# Altium PCB NNLightSwitcher.PcbDoc (part 1 of 3)
Units mil, origin at the board's own origin, x right, y up, seen from the top; angles counter-clockwise.
Board outline 1590 x 2535 mil, 2 copper layers (Top Layer, Bottom Layer); 347 components, 370 nets, 1639 pads, 0 vias.
Unrouted connection lines stored in the file: 1035.
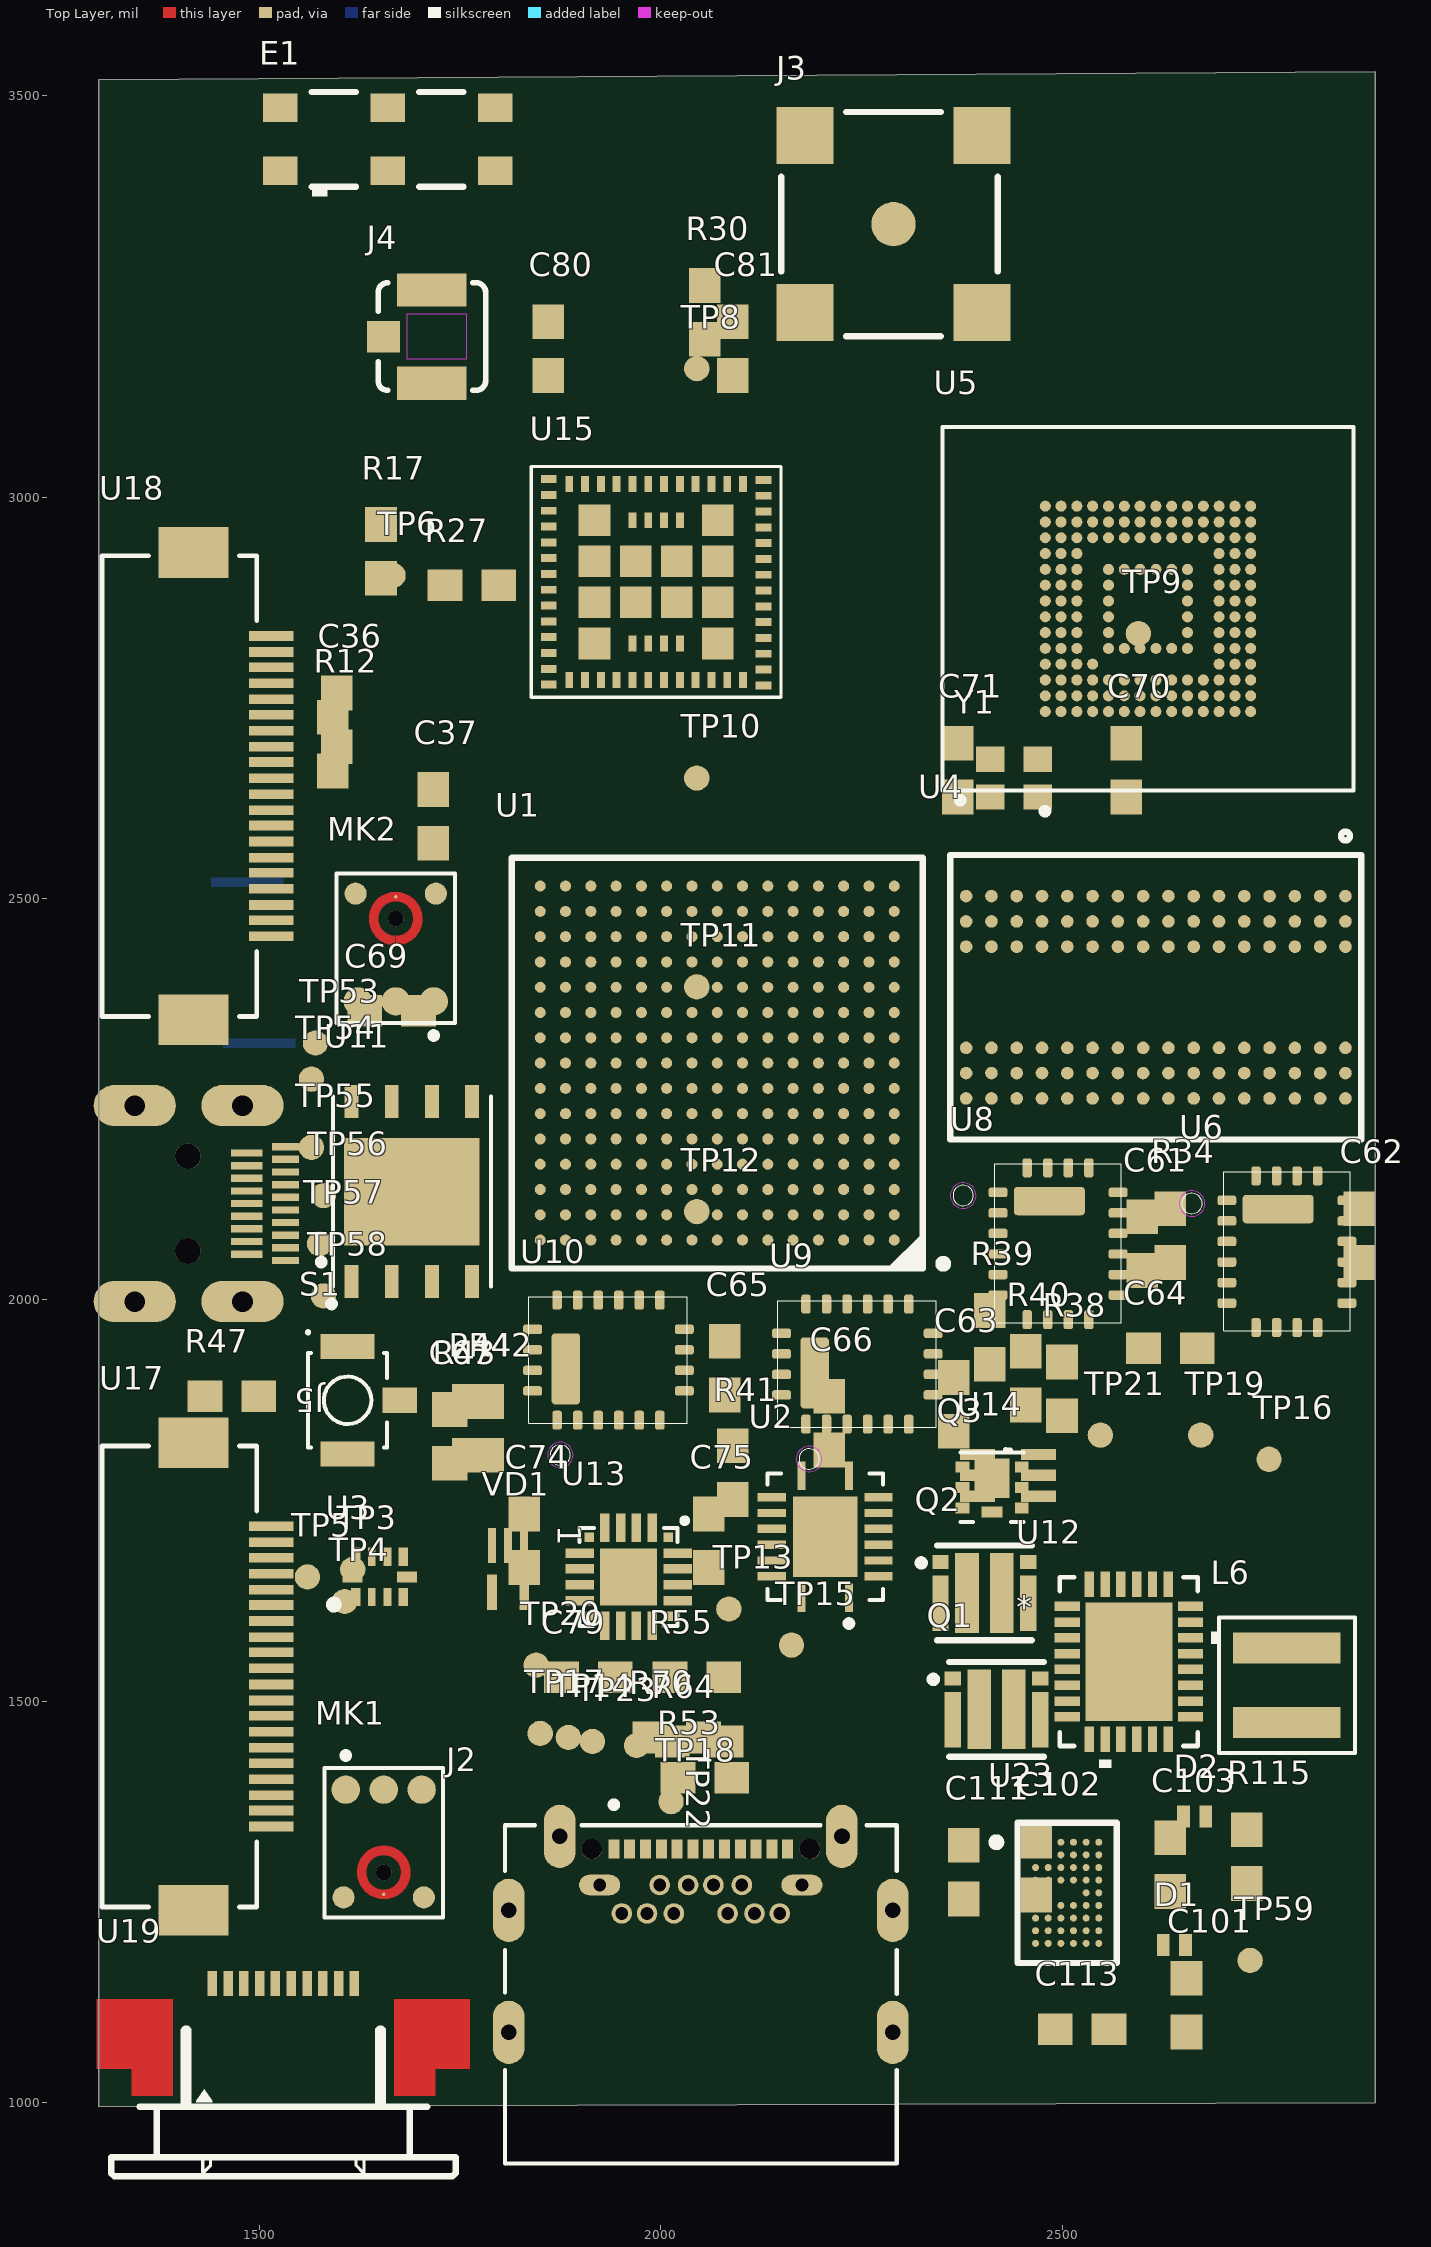
[diagram p0: Top Layer view]
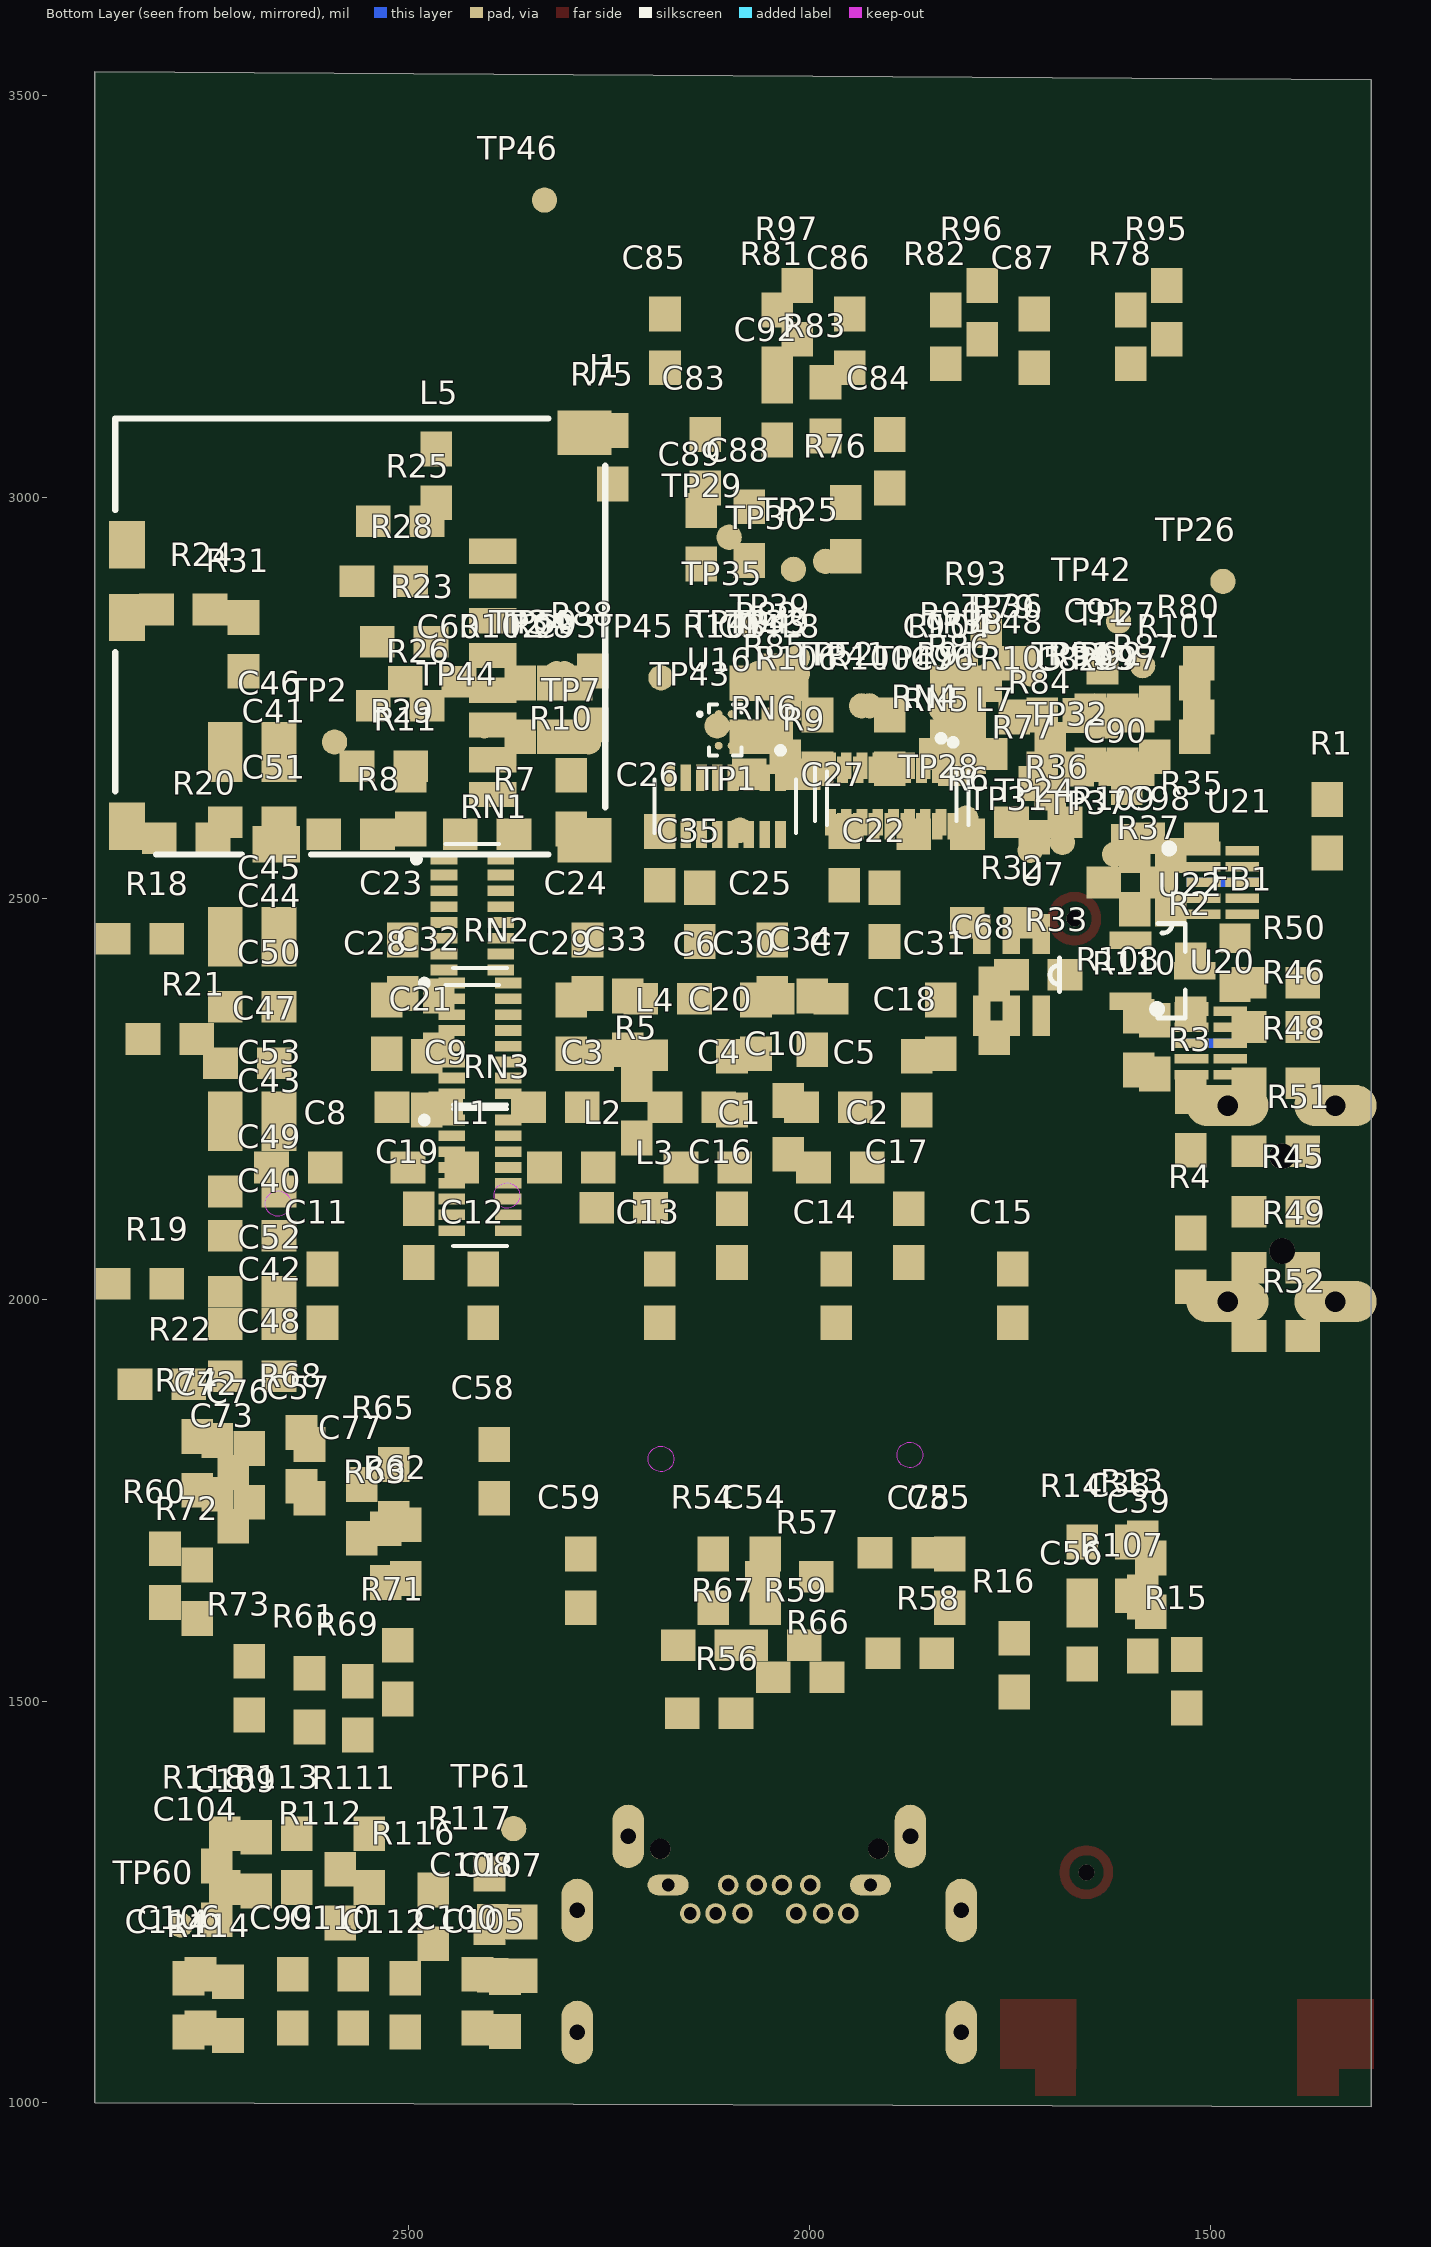
[diagram p1: Bottom Layer view, seen from below]

## Layer stack, top to bottom
Top Solder: solder mask 0.4, Solder Resist, Dk 3.5
Top Layer: signal copper 1.4
Dielectric 1: dielectric 12.6, FR-4, Dk 4.8
Bottom Layer: signal copper 1.4
Bottom Solder: solder mask 0.4, Solder Resist, Dk 3.5

## Board outline
1300,995 1300,3520 2890,3530 2890,1000

## Design rules (kind name [scope] priority, off if disabled: settings)
Clearance [All] p1: gap=10 ignorepadtopadclearanceinfootprint=FALSE except(0: Arc-Hole Track-Hole SMDPad-Hole THPad-Hole Via-Hole Fill-Hole Poly-Hole Region-Hole Text-Hole)
DiffPairsRouting [All] p1: maxlimit=10 minlimit=10 mostfreqgap=10 toplayer_minwidth=15 toplayer_maxwidth=15 toplayer_prefwidth=15 bottomlayer_minwidth=15 bottomlayer_maxwidth=15 bottomlayer_prefwidth=15 maxuncoupledlength=500
PolygonConnect [All] p1: connectstyle=Relief reliefconductorwidth=10 reliefentries=4 polygonreliefangle="90 Angle" airgapwidth=10
RoutingVias [All] p1: holewidth=28 width=50 viastyle="Through Hole" minholewidth=28 minwidth=50 maxholewidth=28 maxwidth=50
SolderMaskExpansion [All] p1: expansion=4
Width [All] p1: maxlimit=10 minlimit=10 preferedwidth=10
29 further rules are at their usual default settings.

## Classes and differential pairs
component class Zynq: C1 C2 C3 C4 C5 C6 C7 C8 C9 C10 C11 C12 C13 C14 C15 C16 C17 C18 C19 C20 C21 C22 C23 C24 C25 C26 C27 C28 C29 C30 C31 C32 C33 C34 C35 L1 L2 L3 L4 R1 R2 R3 R4 R5 R6 R7 R8 R9 R10 R11 TP1 TP2 U1 U2 Y1
component class "Wireless charger": C99 C100 C101 C102 C103 C104 C105 C106 C107 C108 C109 C110 C111 C112 C113 C114 D1 D2 R111 R112 R113 R114 R115 R116 R117 R118 TP59 TP60 TP61 U23
component class WiFI: C82 C83 C84 C85 C86 C87 C88 C89 C90 C91 C92 C93 C94 C95 C96 C97 E1 J3 J4 L7 L8 R75 R76 R77 R78 R79 R80 R81 R82 R83 R84 R85 R86 R87 R88 R89 R90 R91 R92 R93 R94 R95 R96 R97 R98 R99 R100 R101 R102 R103 R104 R105 R106 TP24 TP25 TP26 TP27 TP28 TP29 TP30 TP31 TP32 TP33 TP34 TP35 TP36 TP37 TP38 TP39 TP40 TP41 TP42 TP43 TP44 TP45 TP46 TP47 TP48 TP49 TP50 TP51 TP52 U15 U16
component class USB: C70 C71 C72 C73 C74 C75 C76 C77 C78 C79 C80 C81 J2 L6 Q1 Q2 Q3 R53 R54 R55 R56 R57 R58 R59 R60 R61 R62 R63 R64 R65 R66 R67 R68 R69 R70 R71 R72 R73 R74 TP14 TP15 TP16 TP17 TP18 TP19 TP20 TP21 TP22 TP23 U12 U13 U14 VD1
component class "QSPI flash": C69 R45 R46 R47 R48 R49 R50 R51 R52 U11
component class Power: B1 C61 C62 C63 C64 C65 C66 C67 C68 R32 R33 R34 R35 R36 R37 R38 R39 R40 R41 R42 R43 R44 S1 TP7 TP8 TP9 TP10 TP11 TP12 TP13 U6 U7 U8 U9 U10
component class eMMC: C54 C55 C56 C57 C58 C59 C60 J1 L5 R23 R24 R25 R26 R27 R28 R29 R30 R31 RN4 RN5 RN6 U5
component class DDR3: C40 C41 C42 C43 C44 C45 C46 C47 C48 C49 C50 C51 C52 C53 R18 R19 R20 R21 R22 RN1 RN2 RN3 U4
component class Connectors: C98 FB1 J5 R107 R108 R109 R110 TP53 TP54 TP55 TP56 TP57 TP58 U17 U18 U19 U20 U21 U22
component class Audio: C36 C37 C38 C39 MK1 MK2 R12 R13 R14 R15 R16 R17 TP3 TP4 TP5 TP6 U3
differential pair USB_D: +USB_D_P -USB_D_N
differential pair HDMI_TXC: +HDMI_TXC_P -HDMI_TXC_N
differential pair HDMI_TX2: +HDMI_TX2_P -HDMI_TX2_N
differential pair HDMI_TX1: +HDMI_TX1_P -HDMI_TX1_N
differential pair HDMI_TX0: +HDMI_TX0_P -HDMI_TX0_N
differential pair *USB_D: +*USB_D_P -*USB_D_N

## Components (designator, comment, footprint, x,y, rotation, side; value= is the part's Value field where it differs from the comment)
C1 "CC0201JRNPO8BN101" *0603 2126.54,2165 r180 bottom value=100pF
C2 "CC0201JRNPO8BN101" *0603 1961.54,2165 r180 bottom value=100pF
C3 "CC0201JRNPO8BN101" *0603 2316.54,2240 r180 bottom value=100pF
C4 "CC0201JRNPO8BN101" *0603 2146.54,2240 r180 bottom value=100pF
C5 "CC0201JRNPO8BN101" *0603 1976.54,2240 r180 bottom value=100pF
C6 "CC0201JRNPO8BN101" *0603 2176.54,2375 r180 bottom value=100pF
C7 "CC0201JRNPO8BN101" *0603 2006.54,2375 r180 bottom value=100pF
C8 "CC0201JRNPO8BN101" *0603 2636.54,2165 r180 bottom value=100pF
C9 "CC0201JRNPO8BN101" *0603 2486.54,2240 r180 bottom value=100pF
C10 "CC0201JRNPO8BN101" *0603 2026.54,2215 r90 bottom value=100pF
C11 "CC0201JRNPO8BN101" *0603 2606.54,2005 r90 bottom value=100pF
C12 "CC0201JRNPO8BN101" *0603 2406.54,2005 r90 bottom value=100pF
C13 "CC0201JRNPO8BN101" *0603 2186.54,2005 r90 bottom value=100pF
C14 "CC0201JRNPO8BN101" *0603 1966.54,2005 r90 bottom value=100pF
C15 "CC0201JRNPO8BN101" *0603 1746.54,2005 r90 bottom value=100pF
C16 "CC0201JRNPO8BN101" *0603 2096.54,2080 r90 bottom value=100pF
C17 "CC0201JRNPO8BN101" *0603 1876.54,2080 r90 bottom value=100pF
C18 "CC0201JRNPO8BN101" *0603 1866.54,2270 r90 bottom value=100pF
C19 "CC0201JRNPO8BN101" *0603 2486.54,2080 r90 bottom value=100pF
C20 "CC0201JRNPO8BN101" *0603 2096.54,2270 r90 bottom value=100pF
C21 "CC0201JRNPO8BN101" *0603 2476.54,2270 r90 bottom value=100pF
C22 "CC0201JRNPO8BN101" *0603 1906.54,2480 r90 bottom value=100pF
C23 "CC0201JRNPO8BN101" *0603 2506.54,2415 r90 bottom value=100pF
C24 "CC0201JRNPO8BN101" *0603 2276.54,2415 r90 bottom value=100pF
C25 "CC0201JRNPO8BN101" *0603 2046.54,2415 r90 bottom value=100pF
C26 "CC0201JRNPO8BN101" *0603 2186.54,2550 r90 bottom value=100pF
C27 "CC0201JRNPO8BN101" *0603 1956.54,2550 r90 bottom value=100pF
C28 "CC0201JRNPO8BN101" *0603 2526.54,2340 r90 bottom value=100pF
C29 "CC0201JRNPO8BN101" *0603 2296.54,2340 r90 bottom value=100pF
C30 "CC0201JRNPO8BN101" *0603 2066.54,2340 r90 bottom value=100pF
C31 "CC0201JRNPO8BN101" *0603 1836.54,2340 r90 bottom value=100pF
C32 "CC0201JRNPO8BN101" *0603 2461.54,2345 r90 bottom value=100pF
C33 "CC0201JRNPO8BN101" *0603 2226.54,2345 r90 bottom value=100pF
C34 "CC0201JRNPO8BN101" *0603 1996.54,2345 r90 bottom value=100pF
C35 "CC0201JRNPO8BN101" *0603 2136.54,2480 r90 bottom value=100pF
C36 "0402B103K500CT" *0603 1596.71,2722.43 r90 top value=0.01uF
C37 "CC0201JRNPO8BN101" *0603 1716.71,2602.43 r90 top value=100pF
C38 "0402B103K500CT" *0603 1600,1665 r90 bottom value=0.01uF
C39 "CC0201JRNPO8BN101" *0603 1575,1645 r90 bottom value=100pF
C40 "CC0201JRNPO8BN101" *0603 2694.12,2080 r0 bottom value=100pF
C41 "CC0201JRNPO8BN101" *0603 2694.12,2665 r0 bottom value=100pF
C42 "CC0201JRNPO8BN101" *0603 2694.12,1970 r0 bottom value=100pF
C43 "CC0201JRNPO8BN101" *0603 2694.12,2205 r0 bottom value=100pF
C44 "CC0201JRNPO8BN101" *0603 2694.12,2435 r0 bottom value=100pF
C45 "CC0201JRNPO8BN101" *0603 2694.12,2470 r0 bottom value=100pF
C46 "CC0201JRNPO8BN101" *0603 2694.12,2700 r0 bottom value=100pF
C47 "CC0201JRNPO8BN101" *0603 2700,2295 r0 bottom value=100pF
C48 "CC0201JRNPO8BN101" *0603 2694.12,1905 r0 bottom value=100pF
C49 "CC0201JRNPO8BN101" *0603 2694.12,2135 r0 bottom value=100pF
C50 "CC0201JRNPO8BN101" *0603 2694.12,2365 r0 bottom value=100pF
C51 "CC0201JRNPO8BN101" *0603 2694.12,2595 r0 bottom value=100pF
C52 "CC0201JRNPO8BN101" *0603 2694.12,2010 r0 bottom value=100pF
C53 "CC0201JRNPO8BN101" *0603 2694.12,2240 r0 bottom value=100pF
C54 "CC0201JRNPO8BN101" *0603 2055,1650 r90 bottom value=100pF
C55 "CC0201JRNPO8BN101" *0603 1825,1650 r90 bottom value=100pF
C56 "CC0201JRNPO8BN101" *0603 1660,1580 r90 bottom value=100pF
C57 "CC0201JRNPO8BN101" *0603 2622.76,1786.5 r90 bottom value=100pF
C58 "CC0201JRNPO8BN101" *0603 2392.76,1786.5 r90 bottom value=100pF
C59 "CC0201JRNPO8BN101" *0603 2285,1650 r90 bottom value=100pF
C60 "CC0201JRNPO8BN101" *0603 2470,2770 r0 bottom value=100pF
C61 "CC0201JRNPO8BN101" *0603 2600,2070 r90 top value=100pF
C62 "CC0201JRNPO8BN101" *0603 2870,2080 r90 top value=100pF
C63 "CC0201JRNPO8BN101" *0603 2365,1870 r90 top value=100pF
C64 "CC0201JRNPO8BN101" *0603 2635,1940 r180 top value=100pF
C65 "CC0201JRNPO8BN101" *0603 2080,1915 r90 top value=100pF
C66 "CC0201JRNPO8BN101" *0603 2210,1846.54 r90 top value=100pF
C67 "CC0201JRNPO8BN101" *0603 1735,1830 r90 top value=100pF
C68 "CC0201JRNPO8BN101" *0603 1770,2360 r90 bottom value=100pF
C69 "CC0201JRNPO8BN101" *0603 1665,2360 r180 top value=100pF
C70 "GJM1555C1HR50BB01J" *0603 2580,2660 r90 top value=0.5pF
C71 "GJM1555C1HR50BB01J" *0603 2370,2660 r90 top value=0.5pF
C72 "GJM1555C1HR50BB01J" *0603 2737.76,1791.5 r90 bottom value=0.5pF
C73 "GJM1555C1HR50BB01J" *0603 2717.76,1751.5 r90 bottom value=0.5pF
C74 "GJM1555C1HR50BB01J" *0603 1830,1700 r90 top value=0.5pF
C75 "GJM1555C1HR50BB01J" *0603 2060,1700 r90 top value=0.5pF
C76 "GJM1555C1HR50BB01J" *0603 2697.76,1781.5 r90 bottom value=0.5pF
C77 "GJM1555C1HR50BB01J" *0603 2557.76,1736.5 r90 bottom value=0.5pF
C78 "GJM1555C1HR50BB01J" *0603 1885,1685 r180 bottom value=0.5pF
C79 "GJM1555C1HR50BB01J" *0603 1910,1530 r0 top value=0.5pF
C80 "GJM1555C1HR50BB01J" *0603 1860,3185 r90 top value=0.5pF
C81 "GJM1555C1HR50BB01J" *0603 2090,3185 r90 top value=0.5pF
C82 "0402N8R2C500CT" *0603 1665,2694.67 r90 bottom value=8.2pF
C83 "GJM1555C1HR50BB01J" *0603 2130,3044.67 r90 bottom value=0.5pF
C84 "GJM1555C1HR50BB01J" *0603 1900,3044.67 r90 bottom value=0.5pF
C85 "GJM1555C1HR50BB01J" *0603 2180,3194.67 r90 bottom value=0.5pF
C86 "GJM1555C1HR50BB01J" *0603 1950,3194.67 r90 bottom value=0.5pF
C87 "GJM1555C1HR50BB01J" *0603 1720,3194.67 r90 bottom value=0.5pF
C88 "GJM1555C1HR50BB01J" *0603 2075,2954.67 r90 bottom value=0.5pF
C89 "GJM1555C1HR50BB01J" *0603 2135,2950 r90 bottom value=0.5pF
C90 "GJM1555C1HR50BB01J" *0603 1605,2604.67 r90 bottom value=0.5pF
C91 "GJM1555C1H2R2BB01D" *0603 1635,2754.67 r90 bottom value=2.2pF
C92 "CMP-0006426-2" *0603 2040,3104.67 r90 bottom value=1pF
C93 "CC0201JRNPO8BN101" *0603 2290,2735 r90 bottom value=100pF
C94 "CC0201JRNPO8BN101" *0603 2060,2735 r90 bottom value=100pF
C95 "CC0201JRNPO8BN101" *0603 1830,2735 r90 bottom value=100pF
C96 "CC0201JRNPO8BN101" *0603 1820,2695 r90 bottom value=100pF
C97 "CC0201JRNPO8BN101" *0603 1590,2695 r90 bottom value=100pF
C98 "CC0201JRNPO8BN101" *0603 1550,2520 r90 bottom value=100pF
C99 "CC0201JRNPO8BN101" *0603 2643.5,1126.5 r90 bottom value=100pF
C100 "CC0201JRNPO8BN101" *0603 2413.5,1126.5 r90 bottom value=100pF
C101 "CC0201JRNPO8BN101" *0603 2655,1121.5 r90 top value=100pF
C102 "CC0201JRNPO8BN101" *0603 2467.76,1292.24 r90 top value=100pF
C103 "CC0201JRNPO8BN101" *0603 2635,1296.5 r90 top value=100pF
C104 "CC0201JRNPO8BN101" *0603 2738.5,1261.5 r90 bottom value=100pF
C105 "CC0201JRNPO8BN101" *0603 2379.25,1122.24 r90 bottom value=100pF
C106 "CC0201JRNPO8BN101" *0603 2758.5,1126.5 r90 bottom value=100pF
C107 "CC0201JRNPO8BN101" *0603 2358.5,1191.5 r90 bottom value=100pF
C108 "CC0201JRNPO8BN101" *0603 2394.25,1192.24 r90 bottom value=100pF
C109 "CC0201JRNPO8BN101" *0603 2689.25,1297.24 r90 bottom value=100pF
C110 "CC0201JRNPO8BN101" *0603 2568.5,1126.5 r90 bottom value=100pF
C111 "CC0201JRNPO8BN101" *0603 2377.76,1287.24 r90 top value=100pF
C112 "CC0201JRNPO8BN101" *0603 2503.5,1121.5 r90 bottom value=100pF
C113 "CC0201JRNPO8BN101" *0603 2525,1091.5 r180 top value=100pF
C114 "CC0201JRNPO8BN101" *0603 2773.5,1121.5 r90 bottom value=100pF
D1 "PESD12VV1BL" *SOD882(T) 2640,1196.5 r0 top
D2 "PESD12VV1BL" *SOD882(T) 2665,1356.5 r0 top
E1 "CMP-0001857-1" Ethertronics_M830520 1660,3445.63 r90 top
FB1 "MPZ1608S221ATA00" *INDC1608X80 1470,2420 r270 bottom
J1 "5025700893" MOLEX_5025700893 2559.65,2826.38 r270 bottom
J2 "2129691-1" *TE_2129691-1_2129691-1(Primary) 2050,1135 r0 top
J3 "CMP-0055832-1" Hustsan_SMA-10V21-TGG 2290,3340 r0 top
J4 "U.FL-R-SMT-1(01)" CONN_UFL-R-SMT-1 1715,3200 r0 top
J5 "685119248123" *WURTH_685119248123_685119248123(Primary) 1400,2120 r270 top
L1 "BKP0603HS121-T" *0603 2466.54,2165 r180 bottom value=3.9nH
L2 "BKP0603HS121-T" *0603 2296.54,2165 r180 bottom value=3.9nH
L3 "BKP0603HS121-T" *0603 2231.54,2115 r180 bottom value=3.9nH
L4 "BKP0603HS121-T" *0603 2231.54,2305 r180 bottom value=3.9nH
L5 "BKP0603HS121-T" *0603 2465,3026.54 r90 bottom value=3.9nH
L6 "XFL4020-102MEC" *INDM4040X210 2780,1520 r270 top
L7 "CMP-0058633-2" *0603 1808.46,2680 r180 bottom value=3.9nH
L8 "LQM18PN2R2MFRL" *INDC1608X95N 2050,2765 r180 bottom
MK1 "ICS-40300" *MIC_ICS-40300 1655,1286.85 r0 top
MK2 "ICS-40300" *MIC_ICS-40300 1670,2475 r180 top
Q1 "FDMC8030" *TRANS_FDMC8030 2418.35,1490 r0 top
Q2 "FDMC8030" *TRANS_FDMC8030 2403.35,1635 r0 top
Q3 "NTLUS3A18PZTAG" *TRANS_NTLUS3A18PZTAG 2412.76,1766.5 r0 top
R1 "" *0603 1355,2590 r90 bottom value="2.61 K"
R2 "" *0603 1525,2390 r90 bottom value="12.1 K"
R3 "" *0603 1525,2220 r90 bottom value="12.1 K"
R4 "" *0603 1525,2050 r90 bottom value="80.6 R"
R5 "" *0603 2215,2235 r90 bottom value="80.6 R"
R6 "" *0603 1836.54,2580 r180 bottom value="4.7 K"
R7 "" *0603 2401.54,2580 r180 bottom value="4.7 K"
R8 "" *0603 2571.54,2580 r180 bottom value="33 R"
R9 "" *0603 2041.54,2655 r180 bottom value="1.43 K"
R10 "" *0603 2296.54,2620 r90 bottom value="1.43 K"
R11 "" *0603 2496.54,2620 r90 bottom value="1.43 K"
R12 "" *0603 1591.71,2692.43 r90 top value=?
R13 "" *0603 1585,1670 r90 bottom value=?
R14 "" *0603 1660,1665 r90 bottom value="47 K"
R15 "" *0603 1530,1525 r90 bottom value=?
R16 "" *0603 1745,1545 r90 bottom value=?
R17 "" *0603 1651.71,2932.43 r90 top value="47 K"
R18 "" *0603 2834.12,2450 r0 bottom value="4.7 K"
R19 "" *0603 2834.12,2020 r0 bottom value="4.7 K"
R20 "" *0603 2776.54,2575 r0 bottom value="80.6 R"
R21 "" *0603 2796.54,2325 r0 bottom value="240 R"
R22 "" *0603 2806.54,1895 r0 bottom value="0 R"
R23 "Resistor" *0603 2505,2820 r0 bottom value="12K1 1%"
R24 "Resistor" *0603 2780,2860 r0 bottom value="12K1 1%"
R25 "Resistor" *0603 2510,2970 r0 bottom value="12K1 1%"
R26 "Resistor" *0603 2510,2740 r0 bottom value="12K1 1%"
R27 "Resistor" *0603 1765,2890 r180 top value="33 R 1%"
R28 "Resistor" *0603 2530,2895 r0 bottom value="12K1 1%"
R29 "Resistor" *0603 2530,2665 r0 bottom value="12K1 1%"
R30 "Resistor" *0603 2055,3230 r90 top value="0 R"
R31 "Resistor" *0603 2705,2816.54 r90 bottom value="0 R"
R32 "Resistor" *0603 1770,2470 r180 bottom value="1K43 1%"
R33 "Resistor" *0603 1715,2405 r180 bottom value="12K1 1%"
R34 "Resistor" *0603 2635,2080 r90 top value="0 R"
R35 "Resistor" *0603 1545,2575 r180 bottom value="1K43 1%"
R36 "Resistor" *0603 1715,2595 r180 bottom value="100 R 1%"
R37 "Resistor" *0603 1600,2520 r180 bottom value="2K61 1%"
R38 "Resistor" *0603 2500,1889.12 r90 top value="200 K 1%"
R39 "Resistor" *0603 2410,1953.46 r90 top value="160 K 1%"
R40 "Resistor" *0603 2455,1902.58 r90 top value="0 R"
R41 "Resistor" *0603 2090,1785 r90 top value="0 R"
R42 "Resistor" *0603 1785,1840 r90 top value="200 K 1%"
R43 "Resistor" *0603 1740,1830 r90 top value="301 K 1%"
R44 "Resistor" *0603 1760,1840 r90 top value="0 R"
R45 "Resistor" *0603 1419.12,2110 r0 bottom value="33 R 1%"
R46 "Resistor" *0603 1419.12,2340 r0 bottom value="12K1 1%"
R47 "Resistor" *0603 1465.88,1880 r180 top value="1K43 1%"
R48 "Resistor" *0603 1419.12,2270 r0 bottom value="12K1 1%"
R49 "Resistor" *0603 1419.12,2040 r0 bottom value="12K1 1%"
R50 "Resistor" *0603 1419.12,2395 r0 bottom value="12K1 1%"
R51 "Resistor" *0603 1419.12,2185 r0 bottom value="12K1 1%"
R52 "Resistor" *0603 1419.12,1955 r0 bottom value="0 R"
R53 "" *0603 2055,1405 r0 top value="33 R"
R54 "" *0603 2120,1650 r90 bottom value="33 R"
R55 "" *0603 2045,1530 r0 top value="33 R"
R56 "" *0603 2125,1485 r180 bottom value="33 R"
R57 "" *0603 2025,1655 r180 bottom value=?
R58 "" *0603 1875,1560 r180 bottom value=?
R59 "" *0603 2040,1570 r180 bottom value="1 M"
R60 "Resistor" *0603 2802.76,1656.5 r90 bottom value="0 R"
R61 "Resistor" *0603 2622.76,1501.5 r90 bottom value="3.6 K"
R62 "Resistor" *0603 2502.76,1686.5 r90 bottom value="0 R"
R63 "Resistor" *0603 2527.76,1681.5 r90 bottom value="3.6 K"
R64 "Resistor" *0603 2048,1450 r0 top value="0 R"
R65 "Resistor" *0603 2517.76,1761.5 r90 bottom value="0 R"
R66 "" *0603 2011.54,1530 r180 bottom value="33 R"
R67 "" *0603 2130,1570 r180 bottom value="33 R"
R68 "Resistor" *0603 2632.76,1801.5 r90 bottom value="Thermistor 11.5 K"
R69 "Resistor" *0603 2562.76,1491.5 r90 bottom value="1 K"
R70 "" *0603 2020,1455 r0 top value="100 K"
R71 "Resistor" *0603 2512.76,1536.5 r90 bottom value="47 K"
R72 "Resistor" *0603 2762.76,1636.5 r90 bottom value="1 K"
R73 "Resistor" *0603 2697.76,1516.5 r90 bottom value="1 K"
R74 "Resistor" *0603 2762.76,1796.5 r90 bottom value="1.21 K"
R75 "" *0603 2245,3049.67 r90 bottom value="0 R"
R76 "" *0603 1955,2959.67 r90 bottom value="0 R"
R77 "" *0603 1720,2609.67 r90 bottom value="0 R"
R78 "" *0603 1600,3199.67 r90 bottom value="0 R"
R79 "" *0603 1745,2759.67 r90 bottom value="0 R"
R80 "" *0603 1515,2759.67 r90 bottom value="0 R"
R81 "" *0603 2040,3199.67 r90 bottom value="0 R"
R82 "" *0603 1830,3199.67 r90 bottom value="0 R"
R83 "" *0603 1980,3109.67 r90 bottom value="0 R"
R84 "" *0603 1700,2665 r90 bottom value="100 K"
R85 "" *0603 2030,2710 r90 bottom value="100 K"
R86 "" *0603 1800,2710 r90 bottom value="100 K"
R87 "" *0603 1570,2710 r90 bottom value="100 K"
R88 "" *0603 2270,2750 r90 bottom value="100 K"
R89 "" *0603 2040,2750 r90 bottom value="10 K"
R90 "" *0603 1810,2750 r90 bottom value="10 K"
R91 "" *0603 1820,2700 r90 bottom value="10 K"
R92 "" *0603 1610,2700 r90 bottom value="10 K"
R93 "" *0603 1780,2800 r90 bottom value="10 K"
R94 "" *0603 1650,2700 r90 bottom value="10 K"
R95 "" *0603 1555,3230 r90 bottom value="10 K"
R96 "" *0603 1785,3230 r90 bottom value="10 K"
R97 "" *0603 2015,3230 r90 bottom value="0 R"
R98 "" *0603 2320,2735 r90 bottom value="47 K"
R99 "" *0603 1620,2695 r90 bottom value="10 K"
R100 "" *0603 1900,2695 r90 bottom value="0 R"
R101 "" *0603 1520,2735 r90 bottom value="0 R"
R102 "" *0603 2360,2735 r90 bottom value="100 K"
R103 "" *0603 2080,2735 r90 bottom value="100 K"
R104 "" *0603 1800,2735 r90 bottom value="0 R"
R105 "" *0603 1710,2695 r90 bottom value="0 R"
R106 "" *0603 1990,2695 r90 bottom value="0 R"
R107 "" *0603 1585,1590 r90 bottom value="0 R"
R108 "" *0603 1590,2320 r90 bottom value="200 K"
R109 "" *0603 1595,2520 r90 bottom value="10 R"
R110 "" *0603 1570,2315 r90 bottom value="12.4 K"
R111 "" *0603 2548.5,1301.5 r90 bottom value="100 K"
R112 "" *0603 2584.25,1257.24 r90 bottom value="100 K"
R113 "" *0603 2638.5,1301.5 r90 bottom value="100 K"
R114 "" *0603 2724.25,1117.24 r90 bottom value="30 R 1%"
R115 "" *0603 2730,1306.5 r90 top value="100 K"
R116 "" *0603 2468.5,1231.5 r90 bottom value="47 K"
R117 "" *0603 2398.5,1251.5 r90 bottom value="47 K"
R118 "" *0603 2728.5,1301.5 r90 bottom value="0 R"
RN1 "EXB-2HV431JV" *RESCAXE50P380X160X55-16N 2420,2480 r180 bottom value="33 R"
RN2 "EXB-2HV431JV" *RESCAXE50P380X160X55-16N 2410.24,2325.79 r180 bottom value="33 R"
RN3 "EXB-2HV431JV" *RESCAXE50P380X160X55-16N 2410.24,2155.16 r180 bottom value="33 R"
RN4 "EXB-2HV431JV" *RESCAXE50P380X160X55-16N 1905,2630 r270 bottom value="33 R"
RN5 "EXB-2HV431JV" *RESCAXE50P380X160X55-16N 1890,2625 r270 bottom value="33 R"
RN6 "EXB-2HV431JV" *RESCAXE50P380X160X55-16N 2105,2615 r270 bottom value="33 R"
S1 "B3U-1100P" *SW_B3U-1100P 1610,1875 r90 top
TP1 "5015" Testpoint_Keystone_Miniature 2086.54,2585 r90 bottom
TP2 "5015" Testpoint_Keystone_Miniature 2591.54,2695 r90 bottom
TP3 "5015" Testpoint_Keystone_Miniature 1616.48,1664.37 r90 top
TP4 "5015" Testpoint_Keystone_Miniature 1606.48,1624.37 r90 top
TP5 "5015" Testpoint_Keystone_Miniature 1560,1655 r90 top
TP6 "5015" Testpoint_Keystone_Miniature 1666.71,2902.43 r90 top
TP7 "5015" Testpoint_Keystone_Miniature 2275,2695 r0 bottom
TP8 "5015" Testpoint_Keystone_Miniature 2045,3160 r180 top
TP9 "5015" Testpoint_Keystone_Miniature 2595,2830 r180 top
TP10 "5015" Testpoint_Keystone_Miniature 2045,2650 r180 top
TP11 "5015" Testpoint_Keystone_Miniature 2045,2390 r180 top
TP12 "5015" Testpoint_Keystone_Miniature 2045,2110 r180 top
TP13 "5015" Testpoint_Keystone_Miniature 2085,1615 r180 top
TP14 "5015" Testpoint_Keystone_Miniature 1885,1455 r0 top
TP15 "5015" Testpoint_Keystone_Miniature 2163,1570 r0 top
TP16 "5015" Testpoint_Keystone_Miniature 2757.76,1801.5 r90 top
TP17 "5015" Testpoint_Keystone_Miniature 1850,1460 r0 top
TP18 "5015" Testpoint_Keystone_Miniature 2013,1375 r0 top
TP19 "5015" Testpoint_Keystone_Miniature 2672.76,1831.5 r90 top
TP20 "5015" Testpoint_Keystone_Miniature 1845,1545 r0 top
TP21 "5015" Testpoint_Keystone_Miniature 2547.76,1831.5 r90 top
TP22 "5015" Testpoint_Keystone_Miniature 1970,1445 r0 top
TP23 "5015" Testpoint_Keystone_Miniature 1915,1450 r0 top
TP24 "5015" Testpoint_Keystone_Miniature 1685,2570 r90 bottom
TP25 "5015" Testpoint_Keystone_Miniature 1980,2920 r90 bottom
TP26 "5015" Testpoint_Keystone_Miniature 1485,2895 r90 bottom
TP27 "5015" Testpoint_Keystone_Miniature 1585,2790 r90 bottom
TP28 "5015" Testpoint_Keystone_Miniature 1805,2600 r90 bottom
TP29 "5015" Testpoint_Keystone_Miniature 2100,2950 r90 bottom
TP30 "5015" Testpoint_Keystone_Miniature 2020,2910 r90 bottom
TP31 "5015" Testpoint_Keystone_Miniature 1725,2560 r90 bottom
TP32 "5015" Testpoint_Keystone_Miniature 1645,2665 r90 bottom
TP33 "5015" Testpoint_Keystone_Miniature 2020,2780 r90 bottom
TP34 "5015" Testpoint_Keystone_Miniature 2315,2780 r90 bottom
TP35 "5015" Testpoint_Keystone_Miniature 2075,2840 r90 bottom
TP36 "5015" Testpoint_Keystone_Miniature 1725,2800 r90 bottom
TP37 "5015" Testpoint_Keystone_Miniature 1620,2555 r90 bottom
TP38 "5015" Testpoint_Keystone_Miniature 1775,2780 r90 bottom
TP39 "5015" Testpoint_Keystone_Miniature 2015,2800 r90 bottom
TP40 "5015" Testpoint_Keystone_Miniature 2065,2780 r90 bottom
TP41 "5015" Testpoint_Keystone_Miniature 1925,2740 r90 bottom
TP42 "5015" Testpoint_Keystone_Miniature 1615,2845 r90 bottom
TP43 "5015" Testpoint_Keystone_Miniature 2115,2715 r90 bottom
TP44 "5015" Testpoint_Keystone_Miniature 2405,2715 r90 bottom
TP45 "5015" Testpoint_Keystone_Miniature 2185,2775 r90 bottom
TP46 "5015" Testpoint_Keystone_Miniature 2330,3370 r90 bottom
TP47 "5015" Testpoint_Keystone_Miniature 1835,2735 r90 bottom
TP48 "5015" Testpoint_Keystone_Miniature 1725,2780 r90 bottom
TP49 "5015" Testpoint_Keystone_Miniature 2015,2780 r90 bottom
TP50 "5015" Testpoint_Keystone_Miniature 2305,2780 r90 bottom
TP51 "5015" Testpoint_Keystone_Miniature 1645,2740 r90 bottom
TP52 "5015" Testpoint_Keystone_Miniature 1935,2740 r90 bottom
TP53 "5015" Testpoint_Keystone_Miniature 1570,2320 r180 top
TP54 "5015" Testpoint_Keystone_Miniature 1565,2275 r180 top
TP55 "5015" Testpoint_Keystone_Miniature 1565,2190 r180 top
TP56 "5015" Testpoint_Keystone_Miniature 1580,2130 r180 top
TP57 "5015" Testpoint_Keystone_Miniature 1575,2070 r180 top
TP58 "5015" Testpoint_Keystone_Miniature 1580,2005 r180 top
TP59 "5015" Testpoint_Keystone_Miniature 2734.25,1177.24 r90 top
TP60 "5015" Testpoint_Keystone_Miniature 2783.5,1221.5 r90 bottom
TP61 "5015" Testpoint_Keystone_Miniature 2368.5,1341.5 r90 bottom
U1 "XNLX-XC7Z010-CLG225" CLG225 2070.51,2295 r180 top
U2 "PCA9546ARGYR" *QFN50P400X350X100-17N(205X255) 2205,1705 r180 top
U3 "TLV342SIRUGR" TI-RUG10_V 1650,1655 r0 top
U4 "IS43TR16256AL-125KBL" *BGA96C80P9X16_900X1300X120_IS43TR16256AL-125KBL(Primary) 2616.77,2377.01 r270 top
U5 "MTFC4GACAAAM-1M_WT" *BGA153N50P14X14_1150X1300X100_MTFC4GACAAAM-1M_WT(Primary) 2607.05,2860.79 r90 top
U6 "EN5311QI" *QFN_20-PIN_ATMEL_20M1 2780,2060 r0 top
U7 "TPS3106K33DBVR" *SOT95P280X145-6N 1748.46,2405 r270 bottom
U8 "EN5311QI" *QFN_20-PIN_ATMEL_20M1 2495,2070 r0 top
U9 "EN5311QI" *QFN_20-PIN_ATMEL_20M1 2245,1920 r90 top
U10 "EN5311QI" *QFN_20-PIN_ATMEL_20M1 1935,1925 r90 top
U11 "W25Q32JVZPIQ" *SON127P600X500X80-9N 1690,2135 r90 top
U12 "LTC4155EUFDPBF" *QFN-28_UFD 2583.13,1549.53 r0 top
U13 "CP2102N-A01-GQFN20R" *SILABS_QFN20 1960,1655 r270 top
U14 "MMDT3904-7-F" *SOT65P210X110-6N 2432.76,1781.5 r0 top
U15 "LBEE5HY1MW" "1MW LGA" 1994.41,2894.41 r0 top
U16 "SIT1552AI-JF-DCC-32.768D" *BGA4C100X41P2X2_154X84X60N 2105,2710 r180 bottom
U17 "52892-2095" *MOLEX_52892-2095 1629,1531 r90 top
U18 "52892-2095" *MOLEX_52892-2095 1629,2640 r90 top
U19 "52745-1090" *52745-1090 1530,1050 r0 top
U20 "EMI4192MTTAG" ONSC-WDFN-10-511BM-01_V 1500,2320 r180 bottom
U21 "EMI4192MTTAG" ONSC-WDFN-10-511BM-01_V 1485,2520 r180 bottom
U22 "BAV199T" *SOT95P240X110-3N 1560,2410 r180 bottom
U23 "STWLC33JR" STMicroelectronics_CSP52-8022007_IPC_A 2506.38,1261.5 r0 top
VD1 "TPD2E001IDRLRQ1" SOT50P160X60-5N 1810,1665 r270 top
Y1 "SIT8008AI-73-33E-33.333333G" *OSC_SIT8008AI-73-33E-33.333333G 2440,2650 r0 top

## Footprints (in the part's own frame and the unit in brackets; to place one, negate y for a bottom-side part, rotate by r counter-clockwise, add the part's x,y. Pads: shape width x height; smd on the part's side, far side on the other; paste and mask are expansions set on the pad)
"1MW LGA" [mm]
  rect 0.25x0.5 smd: 1(-2.75,-3.1) 2(-2.25,-3.1) 3(-1.75,-3.1) 4(-1.25,-3.1) 5(-0.75,-3.1) 6(-0.25,-3.1) 7(0.25,-3.1) 8(0.75,-3.1) 9(1.25,-3.1) 10(1.75,-3.1) 11(2.25,-3.1) 12(2.75,-3.1) 27(2.75,3.1) 28(2.25,3.1) 29(1.75,3.1) 30(1.25,3.1) 31(0.75,3.1) 32(0.25,3.1) 33(-0.25,3.1) 34(-0.75,3.1) 35(-1.25,3.1) 36(-1.75,3.1) 37(-2.25,3.1) 38(-2.75,3.1) 54(-0.75,-1.95) 55(-0.25,-1.95) 56(0.25,-1.95) 57(0.75,-1.95) 62(0.75,1.95) 63(0.25,1.95) 64(-0.25,1.95) 65(-0.75,1.95)
  rect 0.5x0.25 smd: 13(3.4,-3.275) 14(3.4,-2.775) 15(3.4,-2.275) 16(3.4,-1.775) 17(3.4,-1.275) 18(3.4,-0.775) 19(3.4,-0.275) 20(3.4,0.225) 21(3.4,0.725) 22(3.4,1.225) 23(3.4,1.725) 24(3.4,2.225) 25(3.4,2.725) 26(3.4,3.225) 39(-3.4,3.25) 40(-3.4,2.75) 41(-3.4,2.25) 42(-3.4,1.75) 43(-3.4,1.25) 44(-3.4,0.75) 45(-3.4,0.25) 46(-3.4,-0.25) 47(-3.4,-0.75) 48(-3.4,-1.25) 49(-3.4,-1.75) 50(-3.4,-2.25) 51(-3.4,-2.75) 52(-3.4,-3.25)
  rect 1x1 smd: 53(-1.95,-1.95) 58(1.95,-1.95) 59(1.95,-0.65) 60(1.95,0.65) 61(1.95,1.95) 66(-1.95,1.95) 67(-1.95,0.65) 68(-1.95,-0.65) 69(-0.65,-0.65) 70(0.65,-0.65) 71(0.65,0.65) 72(-0.65,0.65)
  silkscreen extent -3.95,-3.65 3.95,3.65
*0603 [mm]
  rect 1.1x1 smd: 1(-0.85,0) 2(0.85,0)
*52745-1090 [mm]
  rect 0.3x0.8 smd: 1(-2.25,2.5) 2(-1.75,2.5) 3(-1.25,2.5) 4(-0.75,2.5) 5(-0.25,2.5) 6(0.25,2.5) 7(0.75,2.5) 8(1.25,2.5) 9(1.75,2.5) 10(2.25,2.5)
  Top Layer region: -5.91,2 -3.5,2 -3.5,-0.2 -5.91,-0.2
  Top Layer region: -4.802,-0.2 -3.5,-0.2 -3.5,-1.05 -4.802,-1.05
  Top Layer region: 3.506,-0.2 4.8,-0.2 4.8,-1.052 3.506,-1.052
  Top Layer region: 3.503,2 5.9,2 5.9,-0.2 3.503,-0.2
  silkscreen extent -5.45,-3.6 5.45,1.07
*BGA4C100X41P2X2_154X84X60N [mm]
  round 0.25 smd: 1(-0.205,0.5) 2(-0.205,-0.5) 3(0.205,-0.5) 4(0.205,0.5)
  silkscreen extent -0.82,-0.81 0.51,0.81
*BGA96C80P9X16_900X1300X120_IS43TR16256AL-125KBL(Primary) [mm]
  round 0.4 smd: A1(-3.2,6) A2(-2.4,6) A3(-1.6,6) A7(1.6,6) A8(2.4,6) A9(3.2,6) B1(-3.2,5.2) B2(-2.4,5.2) B3(-1.6,5.2) B7(1.6,5.2) B8(2.4,5.2) B9(3.2,5.2) C1(-3.2,4.4) C2(-2.4,4.4) C3(-1.6,4.4) C7(1.6,4.4) C8(2.4,4.4) C9(3.2,4.4) D1(-3.2,3.6) D2(-2.4,3.6) D3(-1.6,3.6) D7(1.6,3.6) D8(2.4,3.6) D9(3.2,3.6) E1(-3.2,2.8) E2(-2.4,2.8) E3(-1.6,2.8) E7(1.6,2.8) E8(2.4,2.8) E9(3.2,2.8) F1(-3.2,2) F2(-2.4,2) F3(-1.6,2) F7(1.6,2) F8(2.4,2) F9(3.2,2) G1(-3.2,1.2) G2(-2.4,1.2) G3(-1.6,1.2) G7(1.6,1.2) G8(2.4,1.2) G9(3.2,1.2) H1(-3.2,0.4) H2(-2.4,0.4) H3(-1.6,0.4) H7(1.6,0.4) H8(2.4,0.4) H9(3.2,0.4) J1(-3.2,-0.4) J2(-2.4,-0.4) J3(-1.6,-0.4) J7(1.6,-0.4) J8(2.4,-0.4) J9(3.2,-0.4) K1(-3.2,-1.2) K2(-2.4,-1.2) K3(-1.6,-1.2) K7(1.6,-1.2) K8(2.4,-1.2) K9(3.2,-1.2) L1(-3.2,-2) L2(-2.4,-2) L3(-1.6,-2) L7(1.6,-2) L8(2.4,-2) L9(3.2,-2) M1(-3.2,-2.8) M2(-2.4,-2.8) M3(-1.6,-2.8) M7(1.6,-2.8) M8(2.4,-2.8) M9(3.2,-2.8) N1(-3.2,-3.6) N2(-2.4,-3.6) N3(-1.6,-3.6) N7(1.6,-3.6) N8(2.4,-3.6) N9(3.2,-3.6) P1(-3.2,-4.4) P2(-2.4,-4.4) P3(-1.6,-4.4) P7(1.6,-4.4) P8(2.4,-4.4) P9(3.2,-4.4) R1(-3.2,-5.2) R2(-2.4,-5.2) R3(-1.6,-5.2) R7(1.6,-5.2) R8(2.4,-5.2) R9(3.2,-5.2) T1(-3.2,-6) T2(-2.4,-6) T3(-1.6,-6) T7(1.6,-6) T8(2.4,-6) T9(3.2,-6)
  silkscreen extent -5.24,-6.5 4.5,6.5
*BGA153N50P14X14_1150X1300X100_MTFC4GACAAAM-1M_WT(Primary) [mm]
  round 0.35 smd: A1(-3.25,3.25) A2(-2.75,3.25) A3(-2.25,3.25) A4(-1.75,3.25) A5(-1.25,3.25) A6(-0.75,3.25) A7(-0.25,3.25) A8(0.25,3.25) A9(0.75,3.25) A10(1.25,3.25) A11(1.75,3.25) A12(2.25,3.25) A13(2.75,3.25) A14(3.25,3.25) B1(-3.25,2.75) B2(-2.75,2.75) B3(-2.25,2.75) B4(-1.75,2.75) B5(-1.25,2.75) B6(-0.75,2.75) B7(-0.25,2.75) B8(0.25,2.75) B9(0.75,2.75) B10(1.25,2.75) B11(1.75,2.75) B12(2.25,2.75) B13(2.75,2.75) B14(3.25,2.75) C1(-3.25,2.25) C2(-2.75,2.25) C3(-2.25,2.25) C4(-1.75,2.25) C5(-1.25,2.25) C6(-0.75,2.25) C7(-0.25,2.25) C8(0.25,2.25) C9(0.75,2.25) C10(1.25,2.25) C11(1.75,2.25) C12(2.25,2.25) C13(2.75,2.25) C14(3.25,2.25) D1(-3.25,1.75) D2(-2.75,1.75) D3(-2.25,1.75) D4(-1.75,1.75) D12(2.25,1.75) D13(2.75,1.75) D14(3.25,1.75) E1(-3.25,1.25) E2(-2.75,1.25) E3(-2.25,1.25) E5(-1.25,1.25) E6(-0.75,1.25) E7(-0.25,1.25) E8(0.25,1.25) E9(0.75,1.25) E10(1.25,1.25) E12(2.25,1.25) E13(2.75,1.25) E14(3.25,1.25) F1(-3.25,0.75) F2(-2.75,0.75) F3(-2.25,0.75) F5(-1.25,0.75) F10(1.25,0.75) F12(2.25,0.75) F13(2.75,0.75) F14(3.25,0.75) G1(-3.25,0.25) G2(-2.75,0.25) G3(-2.25,0.25) G5(-1.25,0.25) G10(1.25,0.25) G12(2.25,0.25) G13(2.75,0.25) G14(3.25,0.25) H1(-3.25,-0.25) H2(-2.75,-0.25) H3(-2.25,-0.25) H5(-1.25,-0.25) H10(1.25,-0.25) H12(2.25,-0.25) H13(2.75,-0.25) H14(3.25,-0.25) J1(-3.25,-0.75) J2(-2.75,-0.75) J3(-2.25,-0.75) J5(-1.25,-0.75) J10(1.25,-0.75) J12(2.25,-0.75) J13(2.75,-0.75) J14(3.25,-0.75) K1(-3.25,-1.25) K2(-2.75,-1.25) K3(-2.25,-1.25) K5(-1.25,-1.25) K6(-0.75,-1.25) K7(-0.25,-1.25) K8(0.25,-1.25) K9(0.75,-1.25) K10(1.25,-1.25) K12(2.25,-1.25) K13(2.75,-1.25) K14(3.25,-1.25) L1(-3.25,-1.75) L2(-2.75,-1.75) L3(-2.25,-1.75) L12(2.25,-1.75) L13(2.75,-1.75) L14(3.25,-1.75) M1(-3.25,-2.25) M2(-2.75,-2.25) M3(-2.25,-2.25) M4(-1.75,-2.25) M5(-1.25,-2.25) M6(-0.75,-2.25) M7(-0.25,-2.25) M8(0.25,-2.25) M9(0.75,-2.25) M10(1.25,-2.25) M11(1.75,-2.25) M12(2.25,-2.25) M13(2.75,-2.25) M14(3.25,-2.25) N1(-3.25,-2.75) N2(-2.75,-2.75) N3(-2.25,-2.75) N4(-1.75,-2.75) N5(-1.25,-2.75) N6(-0.75,-2.75) N7(-0.25,-2.75) N8(0.25,-2.75) N9(0.75,-2.75) N10(1.25,-2.75) N11(1.75,-2.75) N12(2.25,-2.75) N13(2.75,-2.75) N14(3.25,-2.75) P1(-3.25,-3.25) P2(-2.75,-3.25) P3(-2.25,-3.25) P4(-1.75,-3.25) P5(-1.25,-3.25) P6(-0.75,-3.25) P7(-0.25,-3.25) P8(0.25,-3.25) P9(0.75,-3.25) P10(1.25,-3.25) P11(1.75,-3.25) P12(2.25,-3.25) P13(2.75,-3.25) P14(3.25,-3.25)
  silkscreen extent -6.5,-6.5 5.75,6.5
*INDC1608X80 [mm]
  rect 0.92x0.98 smd: 1(-0.775,0) 2(0.775,0)
*INDC1608X95N [mm]
  rect 0.9x0.97 smd: 1(-0.785,0) 2(0.785,0)
*INDM4040X210 [mm]
  rect 0.98x3.4 smd: 1(-1.185,0) 2(1.185,0)
  silkscreen extent -2.15,-2.15 2.15,2.15
*MIC_ICS-40300 [mm]
  round 0.9 smd: 1(-1.2,2.62) 5(1.2,2.62) 6(0,2.62)
  round 0.7 smd: 2(-1.27,-0.79) 4(1.27,-0.79)
  round 0.1 smd: 3(0,-0.69)
  round 0.5 hole 0.5 unplated: None(0,0)
  Top Layer region: 255 vertices and 0 holes, not listed, extent -0.84,-0.84 0.84,0.84
  silkscreen extent -1.88,-1.42 1.88,3.75
*MOLEX_52892-2095 [mil]
  rect 12x55 smd: 1(187,114) 2(167,114) 3(148,114) 4(128,114) 5(108,114) 6(89,114) 7(69,114) 8(49,114) 9(30,114) 10(10,114) 11(-10,114) 12(-30,114) 13(-49,114) 14(-69,114) 15(-89,114) 16(-108,114) 17(-128,114) 18(-148,114) 19(-167,114) 20(-187,114)
  rect 63x87 smd: 21(-291,211) 22(291,211)
  silkscreen extent -287,132 287,325
*OSC_SIT8008AI-73-33E-33.333333G [mm]
  rect 0.9x0.8 smd: 1(-0.75,-0.6) 2(0.75,-0.6) 3(0.75,0.6) 4(-0.75,0.6)
  silkscreen extent -1.8,-0.8 -1.6,-0.6
*QFN50P400X350X100-17N(205X255) [mm]
  rect 0.26x0.9 smd: 1(-0.75,1.935) 8(-0.75,-1.935) 9(0.75,-1.935) 16(0.75,1.935)
  rect 0.9x0.26 smd: 2(-1.685,1.25) 3(-1.685,0.75) 4(-1.685,0.25) 5(-1.685,-0.25) 6(-1.685,-0.75) 7(-1.685,-1.25) 10(1.685,-1.25) 11(1.685,-0.75) 12(1.685,-0.25) 13(1.685,0.25) 14(1.685,0.75) 15(1.685,1.25)
  rect 2.05x2.55 smd: 17(0,0)
  silkscreen extent -1.83,-2 1.83,2.85
*QFN-28_UFD [mm]
  rect 0.805x0.3 smd: 1(-1.952,1.75) 2(-1.952,1.25) 3(-1.952,0.75) 4(-1.952,0.25) 5(-1.952,-0.25) 6(-1.952,-0.75) 7(-1.952,-1.25) 8(-1.952,-1.75) 15(1.952,-1.75) 16(1.952,-1.25) 17(1.952,-0.75) 18(1.952,-0.25) 19(1.952,0.25) 20(1.952,0.75) 21(1.952,1.25) 22(1.952,1.75)
  rect 0.3x0.805 smd: 9(-1.25,-2.452) 10(-0.75,-2.452) 11(-0.25,-2.452) 12(0.25,-2.452) 13(0.75,-2.452) 14(1.25,-2.452) 23(1.25,2.452) 24(0.75,2.452) 25(0.25,2.452) 26(-0.25,2.452) 27(-0.75,2.452) 28(-1.25,2.452)
  rect 2.75x3.75 smd: 29(0,0)
  silkscreen extent -2.18,-3.36 2.86,2.67
*QFN_20-PIN_ATMEL_20M1 [mm]
  rrect50% 0.6x0.3 smd: 1(-1.9,1.625) 2(-1.9,0.975) 3(-1.9,0.325) 4(-1.9,-0.325) 5(-1.9,-0.975) 6(-1.9,-1.625) 11(1.9,-1.625) 12(1.9,-0.975) 13(1.9,-0.325) 14(1.9,0.325) 15(1.9,0.975) 16(1.9,1.625)
  rrect50% 0.3x0.6 smd: 7(-0.975,-2.4) 8(-0.325,-2.4) 9(0.325,-2.4) 10(0.975,-2.4) 17(0.975,2.4) 18(0.325,2.4) 19(-0.325,2.4) 20(-0.975,2.4)
  rrect25% 2.25x0.9 smd: 21(-0.275,1.35)
  Keep-Out Layer circle w0: c-3,1.525 r0.405
  Keep-Out Layer circle w0: c-3,1.525 r0.405
  Keep-Out Layer circle w0: c-3,1.525 r0.405
  silkscreen extent -3.32,-2.5 2,2.53
*RESCAXE50P380X160X55-16N [mm]
  rect 0.84x0.34 smd: 1(-0.895,1.75) 2(-0.895,1.25) 3(-0.895,0.75) 4(-0.895,0.25) 5(-0.895,-0.25) 6(-0.895,-0.75) 7(-0.895,-1.25) 8(-0.895,-1.75) 9(0.895,-1.75) 10(0.895,-1.25) 11(0.895,-0.75) 12(0.895,-0.25) 13(0.895,0.25) 14(0.895,0.75) 15(0.895,1.25) 16(0.895,1.75)
  silkscreen extent -1.87,-2.23 0.85,2.23
*SILABS_QFN20 [mm]
  rect 0.3x0.3 smd: 1(-1.25,1.25) 6(-1.25,-1.25) 11(1.25,-1.25) 16(1.25,1.25)
  rect 0.9x0.3 smd: 2(-1.55,0.75) 3(-1.55,0.25) 4(-1.55,-0.25) 5(-1.55,-0.75) 12(1.55,-0.75) 13(1.55,-0.25) 14(1.55,0.25) 15(1.55,0.75)
  rect 0.3x0.9 smd: 7(-0.75,-1.55) 8(-0.25,-1.55) 9(0.25,-1.55) 10(0.75,-1.55) 17(0.75,1.55) 18(0.25,1.55) 19(-0.25,1.55) 20(-0.75,1.55)
  rect 1.8x1.8 smd: 21(0,0)
  silkscreen extent -1.85,-1.55 1.55,1.85
*SOD882(T) [mm]
  rect 0.4x0.7 smd: 1(-0.35,0) 2(0.35,0)
*SON127P600X500X80-9N [mm]
  rect 1.04x0.44 smd: 1(-2.845,1.905) 2(-2.845,0.635) 3(-2.845,-0.635) 4(-2.845,-1.905) 5(2.845,-1.905) 6(2.845,-0.635) 7(2.845,0.635) 8(2.845,1.905)
  rect 3.4x4.3 smd: 9(0,0)
  silkscreen extent -3.66,-2.5 3,2.64
*SOT65P210X110-6N [mil]
  rect 44x14 smd: 1(-38,26) 2(-38,0) 3(-38,-26) 4(38,-26) 5(38,0) 6(38,26)
  silkscreen extent -3,32 3,32
*SOT95P240X110-3N [mil]
  rect 52x22 smd: 1(-40,38) 2(-40,-38) 3(40,0)
  silkscreen extent -6,-59 28,59
*SOT95P280X145-6N [mil]
  rect 50x22 smd: 1(-51,37) 2(-51,0) 3(-51,-37) 4(51,-37) 5(51,0) 6(51,37)
  silkscreen extent -21,48 21,60
*SW_B3U-1100P [mm]
  rect 0.8x1.7 smd: 1(1.7,0) 2(-1.7,0)
  rect 0.8x1.1 smd: 3(0,-1.65)
  silkscreen extent -1.5,-1.25 2.2,1.3
*TE_2129691-1_2129691-1(Primary) [mm]
  rect 0.35x0.6 smd: A1(-2.75,4.6) A2(-2.25,4.6) A3(-1.75,4.6) A4(-1.25,4.6) A5(-0.75,4.6) A6(-0.25,4.6) A7(0.25,4.6) A8(0.75,4.6) A9(1.25,4.6) A10(1.75,4.6) A11(2.25,4.6) A12(2.75,4.6)
  oval 1.3x0.65 hole 0.4: B1(3.2,3.46) B12(-3.2,3.46)
  round 0.65 hole 0.4: B2(2.5,2.56) B3(1.7,2.56) B4(1.3,3.46) B5(0.85,2.56) B6(0.4,3.46) B7(-0.4,3.46) B8(-0.85,2.56) B9(-1.3,3.46) B10(-1.7,2.56) B11(-2.5,2.56)
  round 0.65 hole 0.65 unplated: None(-3.45,4.6) None(3.45,4.6)
  oval 1x2 hole 0.5: S1(-6.075,-1.2) S2(6.075,-1.2) S3(-6.075,2.66) S4(6.075,2.66) S5(-4.465,5) S6(4.465,5)
  silkscreen extent -6.2,-5.35 6.2,6.1
*TRANS_FDMC8030 [mm]
  rect 0.52x0.45 smd: 1(-1.39,0.975) 8(1.39,0.975)
  rect 0.52x1.75 smd: 4(-1.39,-0.325) 5(1.39,-0.325)
  rect 0.75x2.52 smd: 9(0.55,0) 10(-0.55,0)
  silkscreen extent -2.11,-1.5 1.5,1.5
*TRANS_NTLUS3A18PZTAG [mm]
  rect 0.43x0.35 smd: 1(-0.935,0.65) 2(-0.935,0) 3(-0.935,-0.65) 4(0.935,-0.65) 5(0.935,0) 6(0.935,0.65)
  rect 1.1x1.25 smd: 7(0,0.285)
  rect 0.66x0.35 smd: 8(0,-0.775)
  silkscreen extent -1,-1.1 1,1.1
*WURTH_685119248123_685119248123(Primary) [mm]
  rect 0.23x0.85 smd: 1(1.8,3.375) 3(1.4,3.375) 5(1,3.375) 7(0.6,3.375) 9(0.2,3.375) 11(-0.2,3.375) 13(-0.6,3.375) 15(-1,3.375) 17(-1.4,3.375) 19(-1.8,3.375)
  rect 0.23x1 smd: 2(1.6,2.15) 4(1.2,2.15) 6(0.8,2.15) 8(0.4,2.15) 10(0,2.15) 12(-0.4,2.15) 14(-0.8,2.15) 16(-1.2,2.15) 18(-1.6,2.15)
  round 0.81 hole 0.81 unplated: None(-1.5,0.28) None(1.5,0.28)
  oval 1.3x2.6 hole 0.65: S1(-3.1,2.01) S2(-3.1,-1.4) S3(3.1,-1.4) S4(3.1,2.01)
  silkscreen extent 1.75,4.4 1.95,4.6
CLG225 [mm] "BGA, 225-Balls, Body 13x13mm, Pitch 0.8mm"
  round 0.35 smd: A1(-5.6,5.6) A2(-4.8,5.6) A3(-4,5.6) A4(-3.2,5.6) A5(-2.4,5.6) A6(-1.6,5.6) A7(-0.8,5.6) A8(0,5.6) A9(0.8,5.6) A10(1.6,5.6) A11(2.4,5.6) A12(3.2,5.6) A13(4,5.6) A14(4.8,5.6) A15(5.6,5.6) B1(-5.6,4.8) B2(-4.8,4.8) B3(-4,4.8) B4(-3.2,4.8) B5(-2.4,4.8) B6(-1.6,4.8) B7(-0.8,4.8) B8(0,4.8) B9(0.8,4.8) B10(1.6,4.8) B11(2.4,4.8) B12(3.2,4.8) B13(4,4.8) B14(4.8,4.8) B15(5.6,4.8) C1(-5.6,4) C2(-4.8,4) C3(-4,4) C4(-3.2,4) C5(-2.4,4) C6(-1.6,4) C7(-0.8,4) C8(0,4) C9(0.8,4) C10(1.6,4) C11(2.4,4) C12(3.2,4) C13(4,4) C14(4.8,4) C15(5.6,4) D1(-5.6,3.2) D2(-4.8,3.2) D3(-4,3.2) D4(-3.2,3.2) D5(-2.4,3.2) D6(-1.6,3.2) D7(-0.8,3.2) D8(0,3.2) D9(0.8,3.2) D10(1.6,3.2) D11(2.4,3.2) D12(3.2,3.2) D13(4,3.2) D14(4.8,3.2) D15(5.6,3.2) E1(-5.6,2.4) E2(-4.8,2.4) E3(-4,2.4) E4(-3.2,2.4) E5(-2.4,2.4) E6(-1.6,2.4) E7(-0.8,2.4) E8(0,2.4) E9(0.8,2.4) E10(1.6,2.4) E11(2.4,2.4) E12(3.2,2.4) E13(4,2.4) E14(4.8,2.4) E15(5.6,2.4) F1(-5.6,1.6) F2(-4.8,1.6) F3(-4,1.6) F4(-3.2,1.6) F5(-2.4,1.6) F6(-1.6,1.6) F7(-0.8,1.6) F8(0,1.6) F9(0.8,1.6) F10(1.6,1.6) F11(2.4,1.6) F12(3.2,1.6) F13(4,1.6) F14(4.8,1.6) F15(5.6,1.6) G1(-5.6,0.8) G2(-4.8,0.8) G3(-4,0.8) G4(-3.2,0.8) G5(-2.4,0.8) G6(-1.6,0.8) G7(-0.8,0.8) G8(0,0.8) G9(0.8,0.8) G10(1.6,0.8) G11(2.4,0.8) G12(3.2,0.8) G13(4,0.8) G14(4.8,0.8) G15(5.6,0.8) H1(-5.6,0) H2(-4.8,0) H3(-4,0) H4(-3.2,0) H5(-2.4,0) H6(-1.6,0) H7(-0.8,0) H8(0,0) H9(0.8,0) H10(1.6,0) H11(2.4,0) H12(3.2,0) H13(4,0) H14(4.8,0) H15(5.6,0) J1(-5.6,-0.8) J2(-4.8,-0.8) J3(-4,-0.8) J4(-3.2,-0.8) J5(-2.4,-0.8) J6(-1.6,-0.8) J7(-0.8,-0.8) J8(0,-0.8) J9(0.8,-0.8) J10(1.6,-0.8) J11(2.4,-0.8) J12(3.2,-0.8) J13(4,-0.8) J14(4.8,-0.8) J15(5.6,-0.8) K1(-5.6,-1.6) K2(-4.8,-1.6) K3(-4,-1.6) K4(-3.2,-1.6) K5(-2.4,-1.6) K6(-1.6,-1.6) K7(-0.8,-1.6) K8(0,-1.6) K9(0.8,-1.6) K10(1.6,-1.6) K11(2.4,-1.6) K12(3.2,-1.6) K13(4,-1.6) K14(4.8,-1.6) K15(5.6,-1.6) L1(-5.6,-2.4) L2(-4.8,-2.4) L3(-4,-2.4) L4(-3.2,-2.4) L5(-2.4,-2.4) L6(-1.6,-2.4) L7(-0.8,-2.4) L8(0,-2.4) L9(0.8,-2.4) L10(1.6,-2.4) L11(2.4,-2.4) L12(3.2,-2.4) L13(4,-2.4) L14(4.8,-2.4) L15(5.6,-2.4) M1(-5.6,-3.2) M2(-4.8,-3.2) M3(-4,-3.2) M4(-3.2,-3.2) M5(-2.4,-3.2) M6(-1.6,-3.2) M7(-0.8,-3.2) M8(0,-3.2) M9(0.8,-3.2) M10(1.6,-3.2) M11(2.4,-3.2) M12(3.2,-3.2) M13(4,-3.2) M14(4.8,-3.2) M15(5.6,-3.2) N1(-5.6,-4) N2(-4.8,-4) N3(-4,-4) N4(-3.2,-4) N5(-2.4,-4) N6(-1.6,-4) N7(-0.8,-4) N8(0,-4) N9(0.8,-4) N10(1.6,-4) N11(2.4,-4) N12(3.2,-4) N13(4,-4) N14(4.8,-4) N15(5.6,-4) P1(-5.6,-4.8) P2(-4.8,-4.8) P3(-4,-4.8) P4(-3.2,-4.8) P5(-2.4,-4.8) P6(-1.6,-4.8) P7(-0.8,-4.8) P8(0,-4.8) P9(0.8,-4.8) P10(1.6,-4.8) P11(2.4,-4.8) P12(3.2,-4.8) P13(4,-4.8) P14(4.8,-4.8) P15(5.6,-4.8) R1(-5.6,-5.6) R2(-4.8,-5.6) R3(-4,-5.6) R4(-3.2,-5.6) R5(-2.4,-5.6) R6(-1.6,-5.6) R7(-0.8,-5.6) R8(0,-5.6) R9(0.8,-5.6) R10(1.6,-5.6) R11(2.4,-5.6) R12(3.2,-5.6) R13(4,-5.6) R14(4.8,-5.6) R15(5.6,-5.6)
  silkscreen extent -7.27,-6.5 6.5,6.5, body extent -6.5,-6.5 6.5,6.5, height 1.5
CONN_UFL-R-SMT-1 [mm] "Hirose recommended land pattern http://www.hirose.co.jp/cataloge_hp/e32119372.pdf 2009.2"
  rect 1.05x1 smd paste-0.1 mask-0.1: 1(-1.525,0)
  rect 2.2x1.05 smd paste-2 mask-2: 2(0,1.475) 3(0,-1.475)
  rect 2x0.9 on Top Paste: 2(0,1.5) 3(0,-1.5)
  rect 2x0.9 on Top Solder: 2(0,1.5) 3(0,-1.5)
  Top Layer keep-out region: -0.8,-0.7 1.1,-0.7 1.1,0.7 -0.8,0.7
  silkscreen extent -1.7,-1.7 1.7,1.7, body extent -1.55,-1.5 1.55,1.5, height 1.27
Ethertronics_M830520 [mm] "SMD, 6-Leads, Body 8x3mm"
  rect 0.9x1.1 smd: 1(-1,3.4) 2(-1,0) 3(-1,-3.4) 4(1,-3.4) 5(1,0) 6(1,3.4)
  silkscreen extent -1.8,-2.4 1.5,2.4, body extent -1.5,-4 1.5,4, height 1.33
Hustsan_SMA-10V21-TGG [mm] "SMD, 4-Leads, Body 7.1x7.1mm"
  round 1.4 smd: 1(0,0)
  rect 1.8x1.8 smd paste-0.076 mask-0.076: 2(-2.8,2.8) 3(-2.8,-2.8)
  rect 1.8x1.8 smd: 4(2.8,-2.8) 5(2.8,2.8)
  silkscreen extent -3.55,-3.55 3.3,3.55, body extent -3.55,-3.55 3.55,3.55, height 10.72
MOLEX_5025700893 [mm]
  rect 0.8x1.5 smd: 1(-2.7,4.2) 2(-1.6,4.2) 3(-0.5,4.2) 4(0.6,4.2) 5(1.7,4.2) 6(2.8,4.2) 7(3.9,4.2) 8(5,4.2)
  rect 1.15x1.5 smd: 9(6.575,-2.65)
  rect 1.5x1.15 smd: 10(-0.6,-7.375) P$3(-2.9,-7.375) P$5(6,-7.375)
  rect 1.4x1.7 smd: P$1(-6.45,7.1) P$2(6.45,7.1)
  silkscreen extent -6.9,-7.75 6.9,7.75, body extent -6.83,-7.58 6.97,7.95, height 1.9
ONSC-WDFN-10-511BM-01_V [mm] "SON, 10-Leads, Body 2.5x2mm, Pitch 0.5mm"
  rect 1.07x0.45 smd: 1(-0.615,1.075)
  rect 1.07x0.3 smd: 2(-0.615,0.5) 3(-0.615,0) 4(-0.615,-0.5) 5(-0.615,-1) 6(0.615,-1) 7(0.615,-0.5) 8(0.615,0) 9(0.615,0.5) 10(0.615,1)
  Top Layer region: -1.15,0.15 1.15,0.15 1.15,-0.15 -1.15,-0.15
  silkscreen extent -1.83,0.95 -1.58,1.2, body extent -1,-1.25 1,1.25, height 0.8
SOT50P160X60-5N [mil]
  rect 44x10 smd: 1(-29,20) 3(-29,-20) 5(-29,0)
  rect 44x12 smd: 4(29,-20) 5(29,20)
  body extent -31,-31 32,31, height 24
STMicroelectronics_CSP52-8022007_IPC_A [mm]
  round 0.221 smd paste+0 mask+0: A1(-1,1.6) A2(-0.6,1.6) A3(-0.2,1.6) A4(0.2,1.6) A5(0.6,1.6) A6(1,1.6) B1(-1,1.2) B2(-0.6,1.2) B3(-0.2,1.2) B4(0.2,1.2) B5(0.6,1.2) B6(1,1.2) C1(-1,0.8) C2(-0.6,0.8) C3(-0.2,0.8) C4(0.2,0.8) C5(0.6,0.8) C6(1,0.8) D1(-1,0.4) D2(-0.6,0.4) D3(-0.2,0.4) D4(0.2,0.4) D5(0.6,0.4) D6(1,0.4) E1(-1,0) E2(-0.6,0) E5(0.6,0) E6(1,0) F1(-1,-0.4) F2(-0.6,-0.4) F3(-0.2,-0.4) F4(0.2,-0.4) F5(0.6,-0.4) F6(1,-0.4) G1(-1,-0.8) G2(-0.6,-0.8) G3(-0.2,-0.8) G4(0.2,-0.8) G5(0.6,-0.8) G6(1,-0.8) H1(-1,-1.2) H2(-0.6,-1.2) H3(-0.2,-1.2) H4(0.2,-1.2) H5(0.6,-1.2) H6(1,-1.2) I1(-1,-1.6) I2(-0.6,-1.6) I3(-0.2,-1.6) I4(0.2,-1.6) I5(0.6,-1.6) I6(1,-1.6)
  silkscreen extent -2.36,-2.22 1.57,2.22, body extent -1.82,-2.47 1.82,2.47, height 0.25
Testpoint_Keystone_Miniature [mm] "Miniature SMT test point"
  round 0.8 smd: 1(0,0)
TI-RUG10_V [mm] "QFN, 10-Leads, Body 2x1.5mm"
  rect 0.3x0.58 smd: 1(-0.75,-0.635) 4(0.75,-0.635) 6(0.75,0.635) 9(-0.75,0.635)
  rect 0.25x0.58 smd: 2(-0.25,-0.635) 3(0.25,-0.635) 7(0.25,0.635) 8(-0.25,0.635)
  rect 0.63x0.35 smd: 5(0.86,0) 10(-0.86,0)
  silkscreen extent -1.57,-1 -1.32,-0.75, body extent -1,-0.75 1,0.75, height 0.4